# Altium PCB AT short bus ( 7 x 4.2 inches).PCBDOC
Units mil, origin at the board's own origin, x right, y up, seen from the top; angles counter-clockwise.
Board outline 7000 x 4200 mil, 2 copper layers (TopLayer, BottomLayer); 7 components, 22 nets, 73 pads, 9 vias.
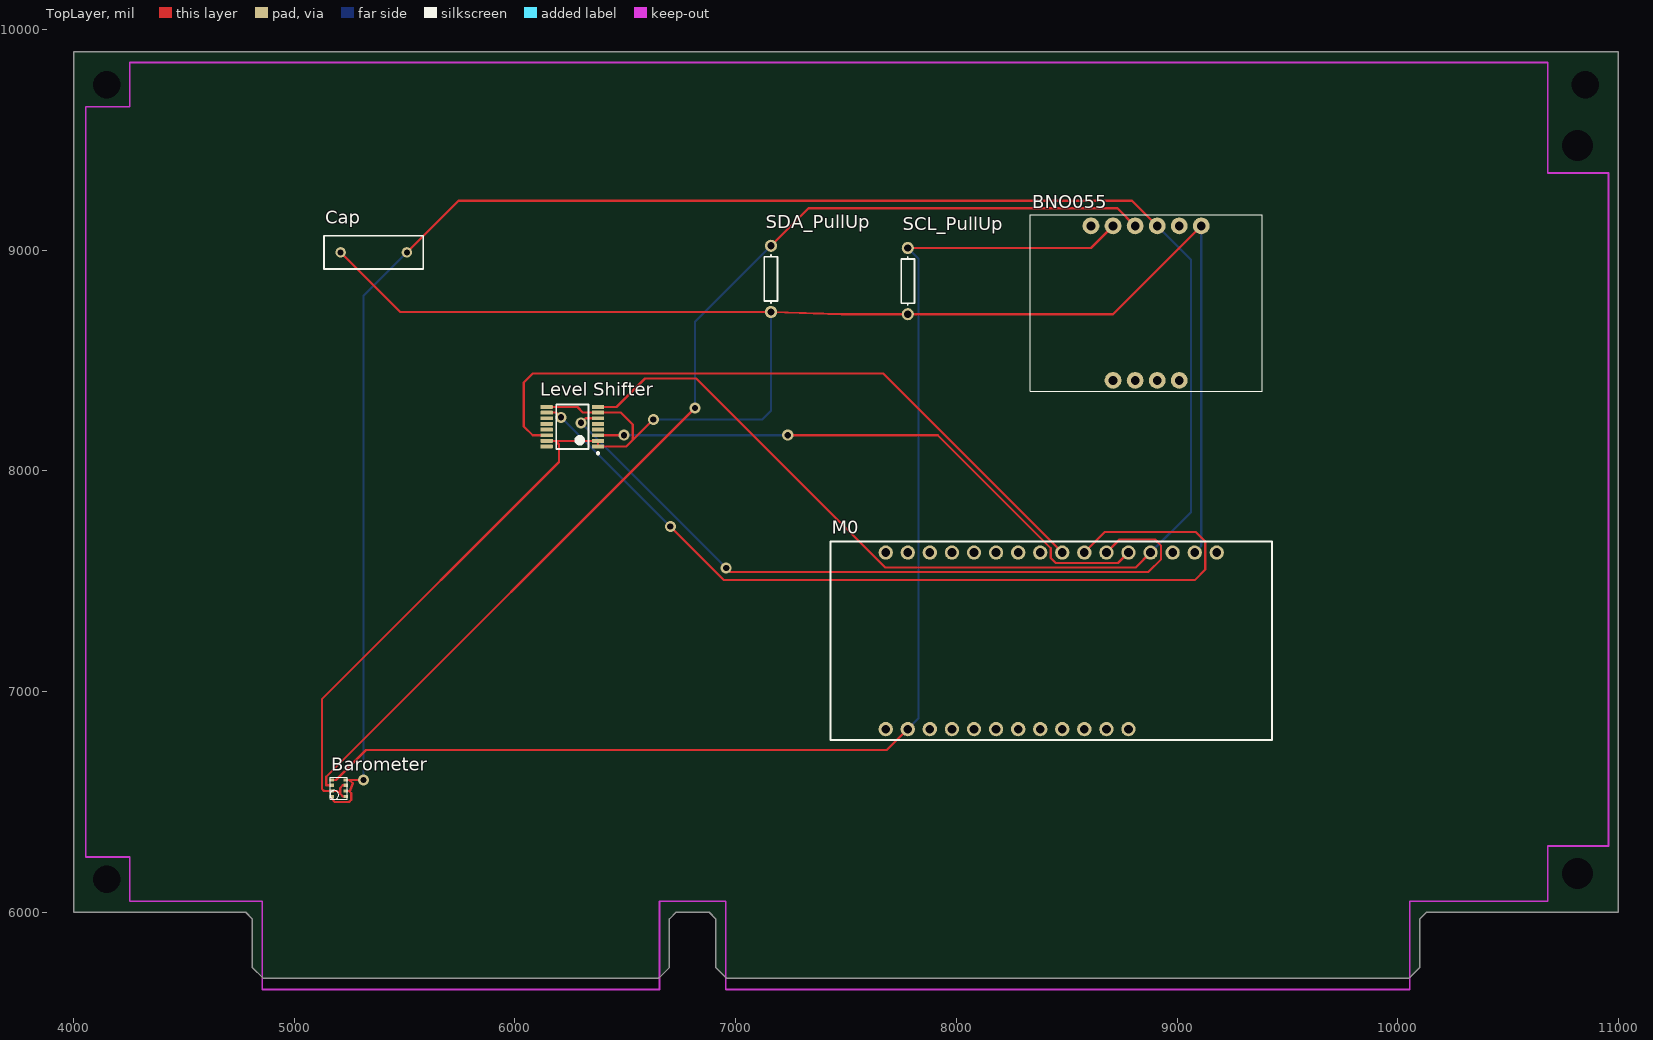
[diagram p0: TopLayer view]
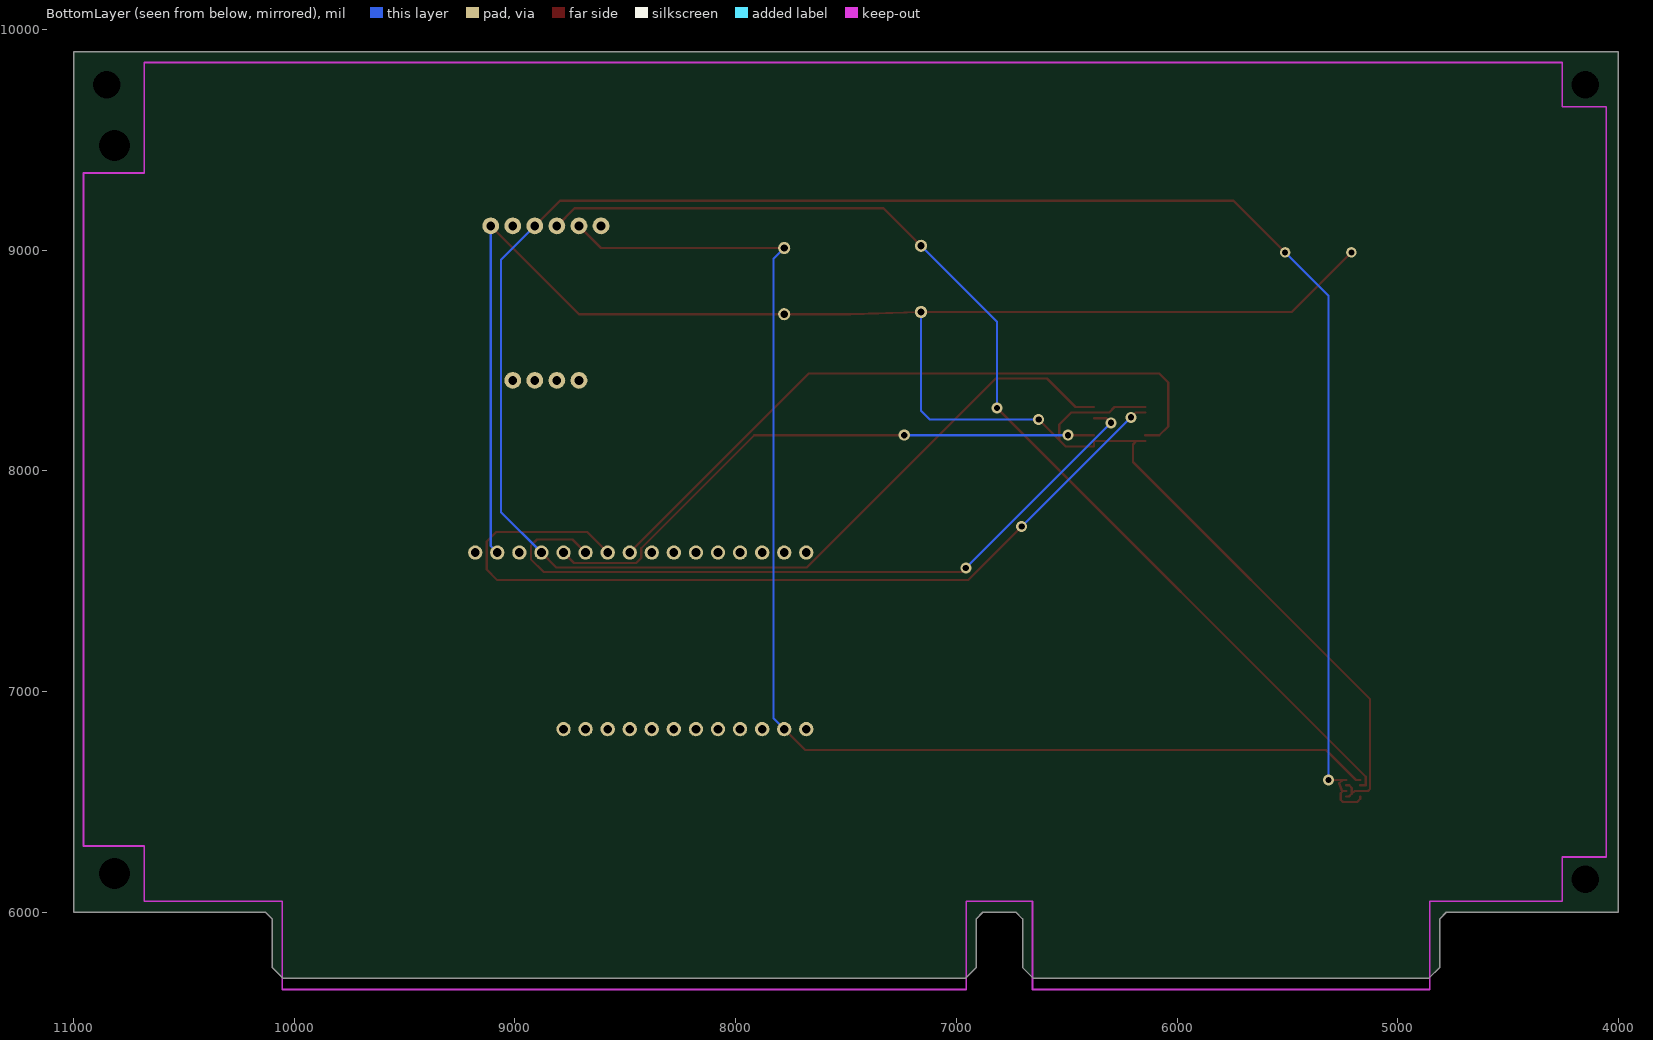
[diagram p1: BottomLayer view, seen from below]

## Layer stack, top to bottom
TopSolder: solder mask 0.4, Solder Resist, Dk 3.5
TopLayer: signal copper 1.4
Dielectric1: core 12.6, FR-4, Dk 4.8
BottomLayer: signal copper 1.4
BottomSolder: solder mask 0.4, Solder Resist, Dk 3.5

## Board outline
4000,6000 4780,6000 4810,5970 4810,5750 4860,5700 6650,5700 6700,5750 6700,5970 6730,6000 6880,6000 6910,5970 6910,5750 6960,5700 10050,5700 10100,5750 10100,5970 10130,6000 11000,6000 11000,9900 4000,9900

## Design rules (kind name [scope] priority, off if disabled: settings)
Clearance [All] p1: gap=10 ignorepadtopadclearanceinfootprint=FALSE except(0: Arc-Hole Track-Hole SMDPad-Hole THPad-Hole Via-Hole Fill-Hole Poly-Hole Region-Hole Text-Hole)
FabricationTestPointUsage TestPointUsage [All] p1: valid=0 allowmultiple=FALSE
FabricationTestpoint Testpoint [All] p1: side=3 testpointundercomponent=TRUE minsize=40 maxsize=100 preferedsize=60 minholesize=20 maxholesize=40 preferedholesize=32 testpointgrid=1 allowsidetop=TRUE allowsidebottom=TRUE usegrid=TRUE gridtolerance=0.01
PasteMaskExpansion PasteMaskExpansion_1 [InComponent('P1')] p1: expansion=-150
PasteMaskExpansion [All] p2: expansion=0
PlaneClearance [All] p1: clearance=10
PolygonConnect [All] p1: connectstyle=Relief reliefconductorwidth=10 reliefentries=4 polygonreliefangle="90 Angle" airgapwidth=10
RoomDefinition "AT short bus ( 7 x 4.2 inches)" [InComponentClass('AT short bus ( 7 x 4.2 inches)')] p1: confinementstyle=ConfineIn formatcopy=TRUE lockcomponents=FALSE outline 0,0 2000,0 2000,1000 0,1000
RoutingVias [All] p1: holewidth=28 width=50 viastyle="Through Hole" minholewidth=28 minwidth=50 maxholewidth=28 maxwidth=50
SilkToSolderMaskClearance SilkscreenOverComponentPads [IsPad] p1: minsilkscreentomaskgap=10 clearancetoexposedcopper=TRUE
SolderMaskExpansion [All] p1: expansion=2
Width [All] p1: maxlimit=10 minlimit=10 preferedwidth=10
25 further rules are at their usual default settings.

## Classes and differential pairs
component class "AT short bus ( 7 x 4.2 inches)": P?

## Components (designator, comment, footprint, x,y, rotation, side; value= is the part's Value field where it differs from the comment)
Barometer "BMP280" BMP280 5240.87,6611.02 r180 top
BNO055 "BNO055 Pinout" BNO055 9385,9160 r180 top
Cap "Cap" RAD-0.3 5360,8990 r180 top value=100pF
"Level Shifter" "CD40109BPWR" PW0016A_N 6260,8200 r180 top
M0 "M0_pinout" M0 9430,7680 r180 top
SCL_PullUp "Res1" AXIAL-0.3 7780,8860 r90 top value=1K
SDA_PullUp "Res1" AXIAL-0.3 7160,8870 r90 top value=1K

## Footprints (in the part's own frame and the unit in brackets; to place one, negate y for a bottom-side part, rotate by r counter-clockwise, add the part's x,y. Pads: shape width x height; smd on the part's side, far side on the other; paste and mask are expansions set on the pad)
AXIAL-0.3 [mm] "Axial Device, Thru-Hole; 2 Leads; 0.3 in Pin Spacing"
  round 1.4 hole 0.85: 1(-3.81,0) 2(3.81,0)
  silkscreen extent -2.77,-0.76 2.77,0.76
BMP280 [mm]
  rect 0.5x0.35 smd: CSB(1.8,1.55) GND(0.2,1.55) GND(1.8,2.2) SCK(1.8,0.3) SDI(1.8,0.9) SDO(0.2,0.3) VDD(0.2,2.2) VDDIO(0.2,0.9)
  silkscreen extent 0,0 2,2.5
BNO055 [mil]
  round 76 hole 39.37: 3VO(375,50) ADR(675,750) GND(475,50) INT(575,750) PS0(375,750) PS1(475,750) RST(775,50) SCL(675,50) SDA(575,50) VIN(275,50)
  silkscreen extent 0,0 1050,800
M0 [mil]
  round 65 hole 39.37: 3.3V(350,50) 5(1550,850) 6(1450,850) 9(1350,850) 10(1250,850) 11(1150,850) 12(1050,850) 13(950,850) A0(650,50) A1(750,50) A2(850,50) A3(950,50) A4(1050,50) A5(1150,50) ARf(450,50) BAT(650,850) En(750,850) GND(550,50) io1(1750,50) MIS(1450,50) MOS(1350,50) RST(250,50) RX0(1550,50) SCK(1250,50) SCL(1650,850) SDA(1750,850) TX1(1650,50) USB(850,850)
  silkscreen extent 0,0 2000,900
PW0016A_N [mm] "SOP, 16-Leads, Body 5.1x4.5mm, Pitch 0.65mm, IPC Medium Density"
  rrect22% 1.4x0.45 smd: 1(-2.95,2.275) 2(-2.95,1.625) 3(-2.95,0.975) 4(-2.95,0.325) 5(-2.95,-0.325) 6(-2.95,-0.975) 7(-2.95,-1.625) 8(-2.95,-2.275) 9(2.95,-2.275) 10(2.95,-1.625) 11(2.95,-0.975) 12(2.95,-0.325) 13(2.95,0.325) 14(2.95,0.975) 15(2.95,1.625) 16(2.95,2.275)
  silkscreen extent -3.08,-2.55 1.85,3.17, body extent -3.21,-2.5 3.21,2.5, height 1
RAD-0.3 [mm] "Radial Cap, Thru-Hole; 2 Leads; 0.3 in Pin Spacing"
  round 1.2 hole 0.7: 1(-3.81,0) 2(3.81,0)
  silkscreen extent -5.71,-1.91 5.71,1.91

## Part data
Cap: "Capacitor", LatestRevisionDate=17-Jul-2002, LatestRevisionNote="Re-released for DXP Platform.", PackageDescription="Radial Cap, Thru-Hole; 2 Leads; 0.3 in Pin Spacing", PackageReference=RAD-0.3, Published=8-Jun-2000, Publisher="Altium Limited"
"Level Shifter": library part CMP-1527-00009-2, "CMOS Quad Low-to-High Voltage Level Shifter, 3 to 18 V, -55 to 125 degC, 16-Pin TSSOP (PW16), RoHS, Tape and Reel", Manufacturer="Texas Instruments", Package Reference=PW0016A, Temperature Range="-55 to 125 degC", ComponentLink1Description="Manufacturer URL", ComponentLink1URL=www.ti.com, ComponentLink2Description=Datasheet, ComponentLink2URL=http://www.ti.com/lit/ds/symlink/cd40109b.pdf, ComponentLink3Description="Package Specification", ComponentLink3URL=http://www.ti.com/lit/ml/mpds361/mpds361.pdf, DatasheetVersion=SCHS099B, Mounting Technology="Surface Mount", Number of Bits=4, Number of Channels=4, Number of Outputs=4, PackageDescription="16-Pin Plastic Small Outline Package, Body 5 x 4.4 mm, Pitch 0.65 mm", PackageVersion=4040064-4/G, Packing="Tape and Reel", PartNumber=CD40109BPWR, Propagation Delay="240 ns Max.", RoHS=TRUE, VSS="3 to 18 V"
SCL_PullUp SDA_PullUp: "Resistor", LatestRevisionDate=17-Jul-2002, LatestRevisionNote="Re-released for DXP Platform.", PackageDescription="Axial Device, Thru-Hole; 2 Leads; 0.3 in Pin Spacing", PackageReference=AXIAL-0.3, Published=8-Jun-2000, Publisher="Altium Limited"

## Free pads (board coordinates)
  round 50 hole 140: 1(10815,6175) 2(10815,9475)
  round 50 hole 125: 3(10850,9750) 4(4150,9750) 5(4150,6150)

## Via types
v1: diameter 50, hole 28, TopLayer to BottomLayer, 9 vias

## Nets (pads, with @x,y where several pads share a name; then routed paths per layer and width w, separated by ;. In a path a pad name is that pad's centre, name@x,y a point inside that pad or via, vN(x,y) a via of type N, cw(c..) or ccw(c..) an arc to the next point about the centre after c; other vN are vias at no path point)
3.3V: "Level Shifter.1" "Level Shifter.2" "Level Shifter.7" "Level Shifter.9" "Level Shifter.15" Barometer.CSB Barometer.VDD Barometer.VDDIO BNO055.VIN Cap.2 M0.3.3V SCL_PullUp.1 SDA_PullUp.1 | length 9944.4
  TopLayer w10: Cap.2 5480,8720 SDA_PullUp.1 7480,8710 SCL_PullUp.1 8710,8710 BNO055.VIN ; Barometer.VDD 5220.59,6524.41 ; Barometer.VDDIO 5220,6575.59 5208,6563.59 5208,6537 ; 6143.86,8136.02 6184,8136.02 ; 6143.86,8289.57 6283,8289.57 6308.59,8263.98 6376.14,8263.98 6480,8263.98 6534,8209.98 6534,8140 ; v1(6627,8233) 6534,8140 ; 5208,6537 5220.59,6524.41 ; 5208,6537 5195,6550 Barometer.CSB 5135.16,6550 5125.16,6560 5125.16,6965.18 6200,8040.02 6200,8120.02 6184,8136.02 ; 5208,6537 5208,6536.41 5220,6524.41 5220.59,6524.41 ; 6184,8136.02 6376.14,8136.02 6376.14,8110.43 6504.43,8110.43 6534,8140
  BottomLayer w10: v1(6627,8233) 7120,8233 7160,8273 SDA_PullUp.1 ; M0.3.3V 9110,7660 BNO055.VIN
5V: "Level Shifter.16"
BL_MOTOR: "Level Shifter.11"
BL_MOTOR_3.3: "Level Shifter.10" M0.A2 | length 4049.7
  TopLayer w10: 6143.86,8263.98 6188.02,8263.98 v1(6209,8243) ; v1(6704,7748) 6947,7505 9080,7505 9128,7553 9128,7680 9085,7723 8673,7723 M0.A2
  BottomLayer w10: v1(6209,8243) v1(6704,7748)
BR_MOTOR: "Level Shifter.4"
BR_MOTOR_3.3: "Level Shifter.3" M0.A0 | length 2689.8
  TopLayer w10: 6376.14,8161.61 v1(6494,8161.61) ; v1(7236,8161.61) 7916.39,8161.61 8428,7650 8428,7605 8450.5,7582.5 8732.5,7582.5 M0.A0
  BottomLayer w10: v1(6494,8161.61) v1(7236,8161.61)
FL_MOTOR: "Level Shifter.13"
FL_MOTOR_3.3: "Level Shifter.14" M0.A3 | length 3112.3
  TopLayer w10: 6143.86,8161.61 6080,8161.61 6040,8201.61 6040,8401 6080,8441 7669,8441 M0.A3
FR_MOTOR: "Level Shifter.5"
FR_MOTOR_3.3: "Level Shifter.6" M0.A1 | length 3363.2
  TopLayer w10: v1(6299,8218) 6319.39,8238.39 6376.14,8238.39 ; v1(6957,7560) 6974.5,7542.5 8870.5,7542.5 8928,7600 8928,7661 8900,7689 8739,7689 M0.A1
  BottomLayer w10: v1(6299,8218) v1(6957,7560)
GND: "Level Shifter.8" Barometer.GND Barometer.SDO BNO055.GND Cap.1 M0.GND | length 10903.8
  TopLayer w10: Barometer.GND@5170,6524.41 5170,6514 5184,6500 5248,6500 5258,6510 5258,6540 5251.39,6546.61 ; Barometer.SDO 5250,6599.21 ; v1(5314,6599.21) 5250,6599.21 ; Cap.1 5744,9224 8796,9224 BNO055.GND ; 6376.14,8289.57 6460,8289.57 6589.43,8419 6822,8419 7678.5,7562.5 8812.5,7562.5 M0.GND ; 5250,6599.21 5264.79,6584.42 5251.39,6546.61 ; 5251.39,6546.61 5248,6550 5232.99,6550 5251.39,6546.61
  BottomLayer w10: v1(5314,6599.21) 5314,8794 Cap.1 ; M0.GND 9063,7813 9063,8957 BNO055.GND
KILL: M0.13
KILL_RC_PIN: M0.12
PITCH_RC_PIN: M0.6
ROLL_RC_PIN: M0.10
RX: M0.RX0
SCL: Barometer.SCK BNO055.SCL M0.SCL SCL_PullUp.2 | length 5896.8
  TopLayer w10: Barometer.SCK 5189,6599.21 5324.79,6735 7685,6735 M0.SCL ; SCL_PullUp.2 8610,9010 BNO055.SCL
  BottomLayer w10: M0.SCL 7828,6878 7828,8962 SCL_PullUp.2
SDA: Barometer.SDI BNO055.SDA SDA_PullUp.2 | length 5057.4
  TopLayer w10: Barometer.SDI 5145.16,6575.59 5145.16,6614.16 v1(6816,8285) ; SDA_PullUp.2 7330,9190 8730,9190 BNO055.SDA
  BottomLayer w10: v1(6816,8285) 6816,8676 SDA_PullUp.2
SONAR: M0.9
THROTTLE_RC_PIN: M0.5
TX: M0.TX1
YAW_RC_PIN: M0.11
pads on no net: "Level Shifter.12" BNO055.3VO BNO055.ADR BNO055.INT BNO055.PS0 BNO055.PS1 BNO055.RST M0.A4 M0.A5 M0.ARf M0.BAT M0.En M0.io1 M0.MIS M0.MOS M0.RST M0.SCK M0.SDA M0.USB

## Keep-outs
KeepOutLayer:
  lines w8: 4055,6250 4055,9650 4255,9650 4255,9850 10680,9850 10680,9350 10955,9350 10955,6300 10680,6300 10680,6050 10055,6050 10055,5650 6955,5650 6955,6050 6655,6050 6655,5650 4855,5650 4855,6050 4255,6050 4255,6250 4055,6250

## Other copper
TopLayer:
  text ".GTL" at 10700,10050 h90
BottomLayer:
  text "P/N XXXXXX-XXX REV A" at 5320,10100 h75
  text ".GBL" at 10700,10050 h90

## Silkscreen, mask and mechanical layers (free items; w line width, h text height)
TopOverlay:
  rectangle: 4281,10593 5031,10793
  rectangle: 4281,10303 5031,10503
  lines w10: 5392.59,10695.97 ccw(c5441,10735.5) 5392.71,10695.83
  text "C" at 5496,10698 h60
  text "2002 COMPANY NAME" at 5646,10698 h75
  text "S/N" at 4031,10650.5 h75
  text "BOARD NAME" at 5496,10523 h75
  text "ASSY NO.: XXXXXX" at 5496,10373 h75
  text "REV" at 4031,10353 h75
  text ".GTO" at 10700,10050 h90
TopPaste:
  text ".GTP" at 10700,10050 h90
BottomPaste:
  text ".GBP" at 10700,10050 h90
TopSolder:
  rectangle: 4785,5675 6725,6005
  rectangle: 6885,5675 10125,6005
  text ".GTS" at 10700,10050 h90
BottomSolder:
  rectangle: 4785,5675 6725,6005
  rectangle: 6885,5675 10125,6005
  text ".GBS" at 10700,10050 h90
Mechanical1:
  the board outline again, w20
Mechanical3:
  lines w10: 10690,6125 10690,6075 10740,6075 ; 10690,6150 10690,6200 ; 10690,6225 10690,6275 10740,6275 ; 10765,6075 10815,6075 ; 10765,6275 10815,6275 ; 10765,9375 10815,9375 ; 10765,9575 10815,9575 ; 10840,6075 10890,6075 ; 10840,6275 10890,6275 ; 10840,9375 10890,9375 ; 10840,9575 10890,9575 ; 10915,6075 10965,6075 ; 10915,6275 10965,6275 ; 10915,9375 10965,9375 ; 10915,9575 10965,9575 ; 11000,6075 11040,6075 11040,4925 11065,4925 11065,9650 11490,9650 11490,9675 11040,9675 11040,9575 11000,9575 ; 11000,6275 11040,6275 11040,9375 11000,9375
Mechanical4:
  circle w10: c4845.67,5719.32 r100
  lines w10: 12120,7695 12195,7620 12270,7695 12345,7620 12420,7695 12495,7620 12570,7695 ; 12601.25,6613.75 12845,6370 13045,6370 ; 13745,7820 14470,7820 ; 15095,6370 14845,6370 15138.75,6663.75 ; 16045,6570 16045,6970 16245,7070 15845,7170 16045,7270 16045,7670 ; 4703.67,5666.32 4703.67,5721.32 4723.67,5671.32 4703.67,5666.32 ; 4703.87,5721.16 4705,5775 4725.36,5771.79 4703.87,5721.16 ; 12495,6720 12620,6632.5 12582.5,6595 12495,6720 ; 15120,6682.5 15245,6770 15157.5,6645 15120,6682.5
  lines w20: 12145,7670 12145,6770 12245,6670 12445,6670 12545,6770 12545,7670 ; 15145,7670 15145,6870 15345,6670 16045,6670
  text ".Pcb_File_Name_No_Path" at 8800,10240 h90
  text ".Printout_Name" at 8800,10050 h90
  text "DETAIL A" at 13745,7870 h120
  text "o" at 13770,6395 h60
  text "o" at 15820,6395 h60
  text ".020 X 45  CHAMFER" at 13120,6320 h90
  text "0.05 X 45  CHAMFER" at 15170,6320 h90
  text "BOTH SIDES" at 13120,6145 h90
  text "TYP 4 PLCS" at 15170,6145 h90
  text "ENTIRE LENGTH OF" at 13120,5970 h90
  text "EDGE CONNECTOR" at 13120,5795 h90
  text "SEE DETAIL A" at 4210,5690 h50
DrillDrawing:
  text ".LEGEND" at 12050,8550 h90
  text "Drilling Details." at 12050,8400 h90

## Dimensions
4150,5980 to 4000,6000 on Mechanical4
3980,6150 to 4000,6000 on Mechanical4
10150,5700 to 10130,6000 on Mechanical4